# Altium PCB PCB1.PcbDoc
Units mm, origin at the board's own origin, x right, y up, seen from the top; angles counter-clockwise.
Board outline 59.11 x 65.08 mm, 4 copper layers (Top Layer, GND-Plane, 3V3 Polygon, Bottom Layer), stack 0.603 mm thick; 41 components, 21 nets, 157 pads, 83 vias.
Unrouted connection lines stored in the file: 58.
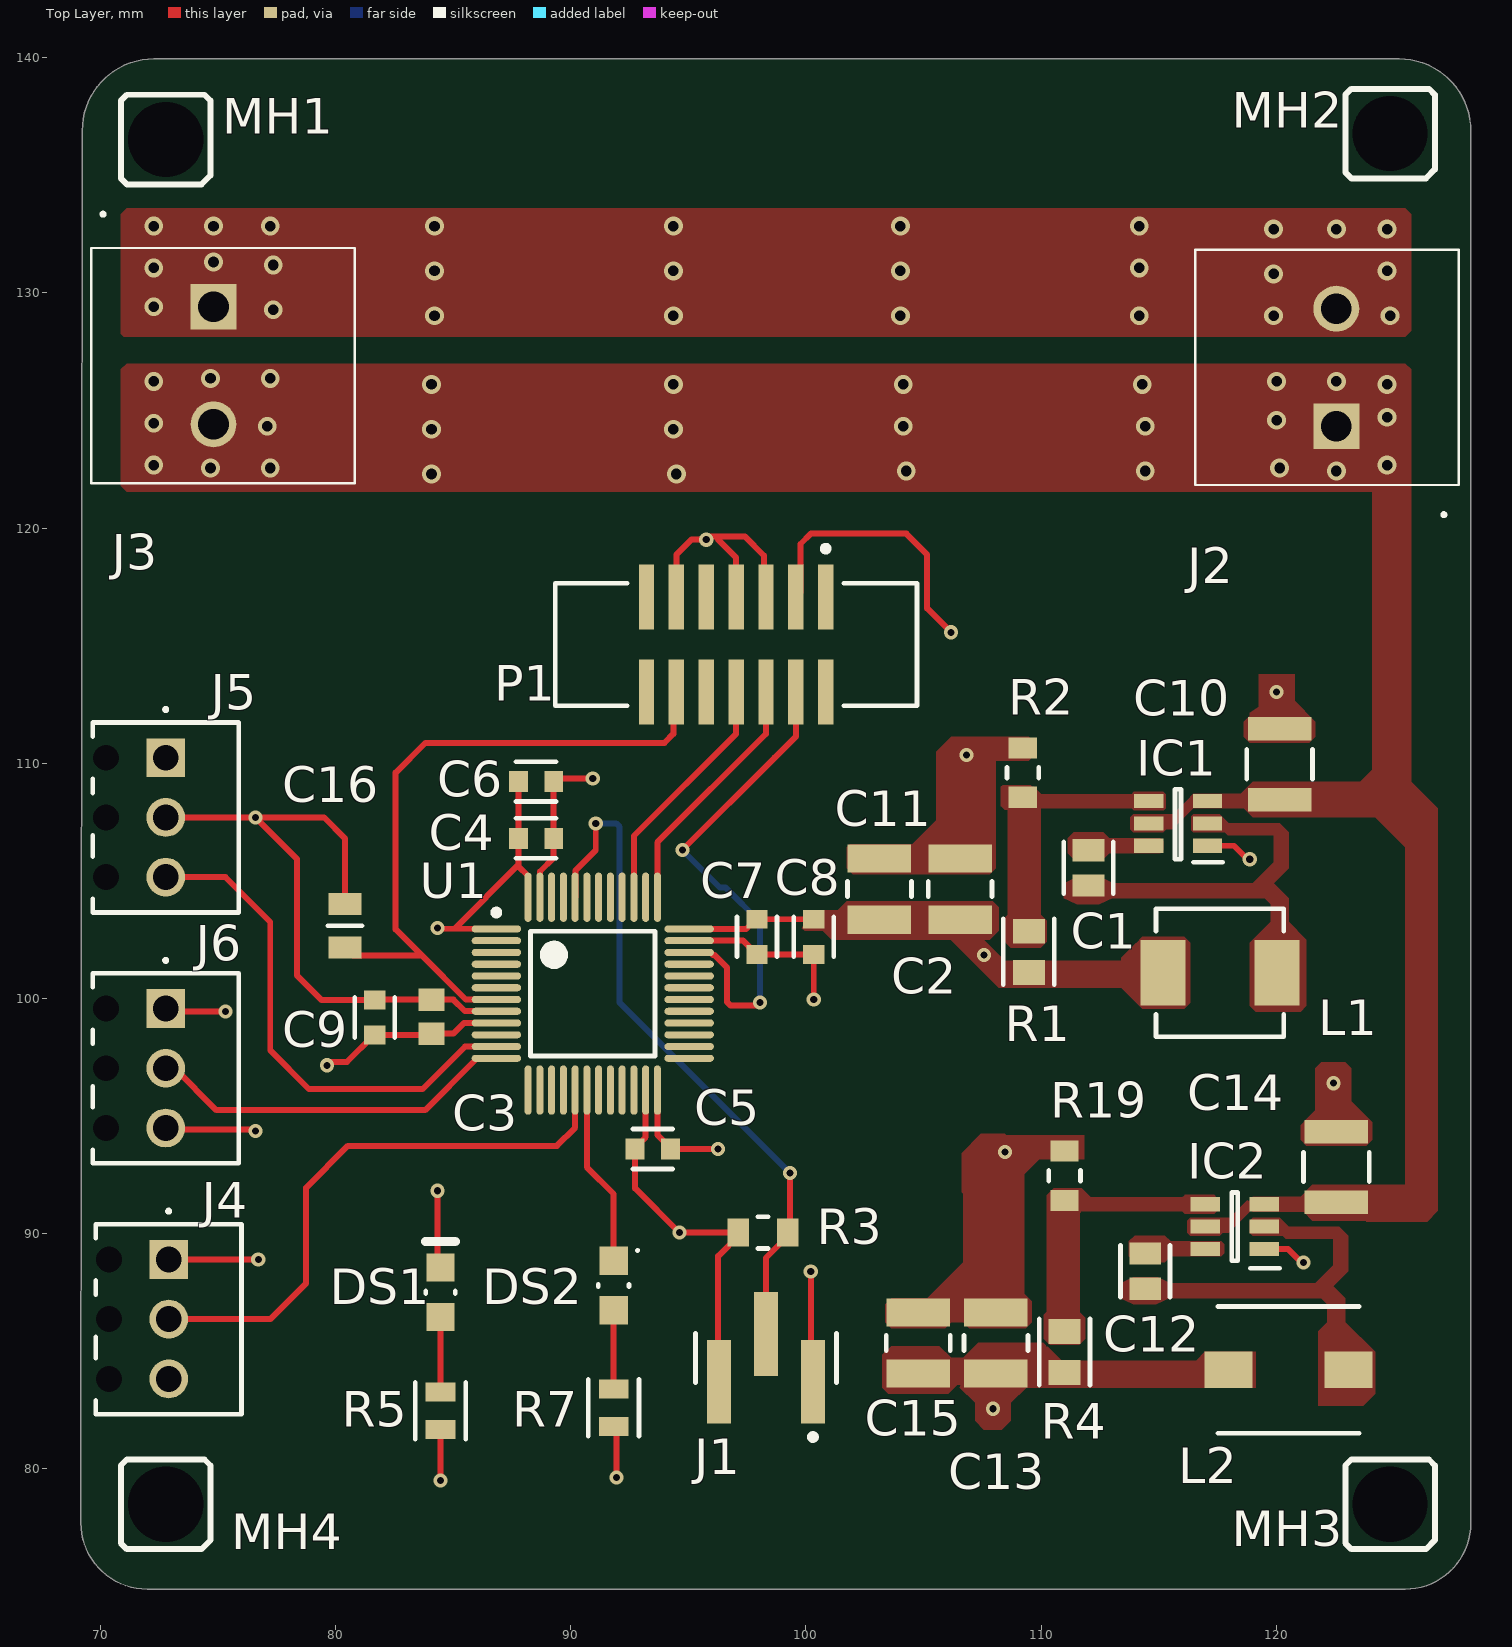
[diagram p0: Top Layer view]
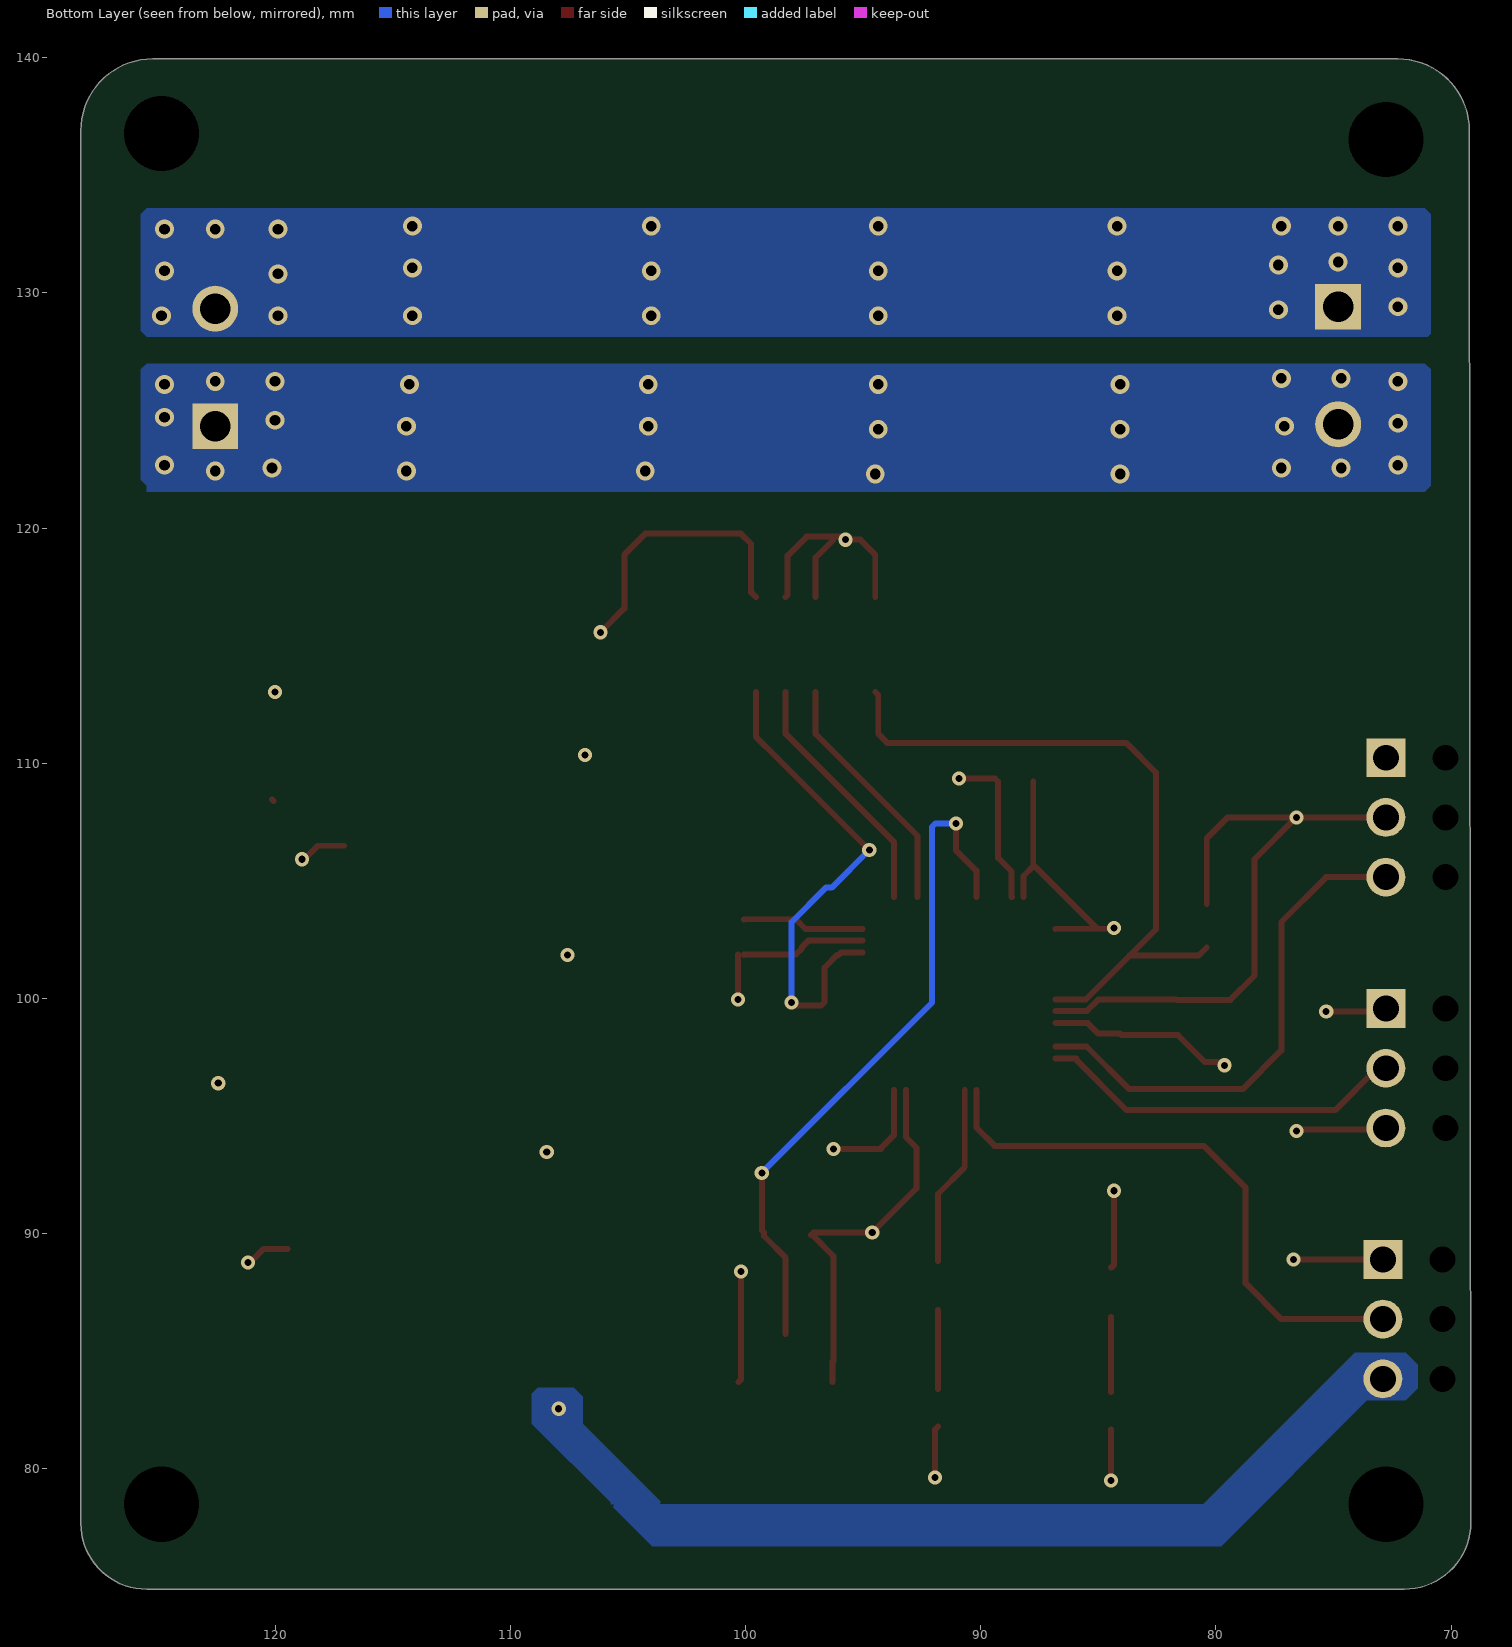
[diagram p1: Bottom Layer view, seen from below]
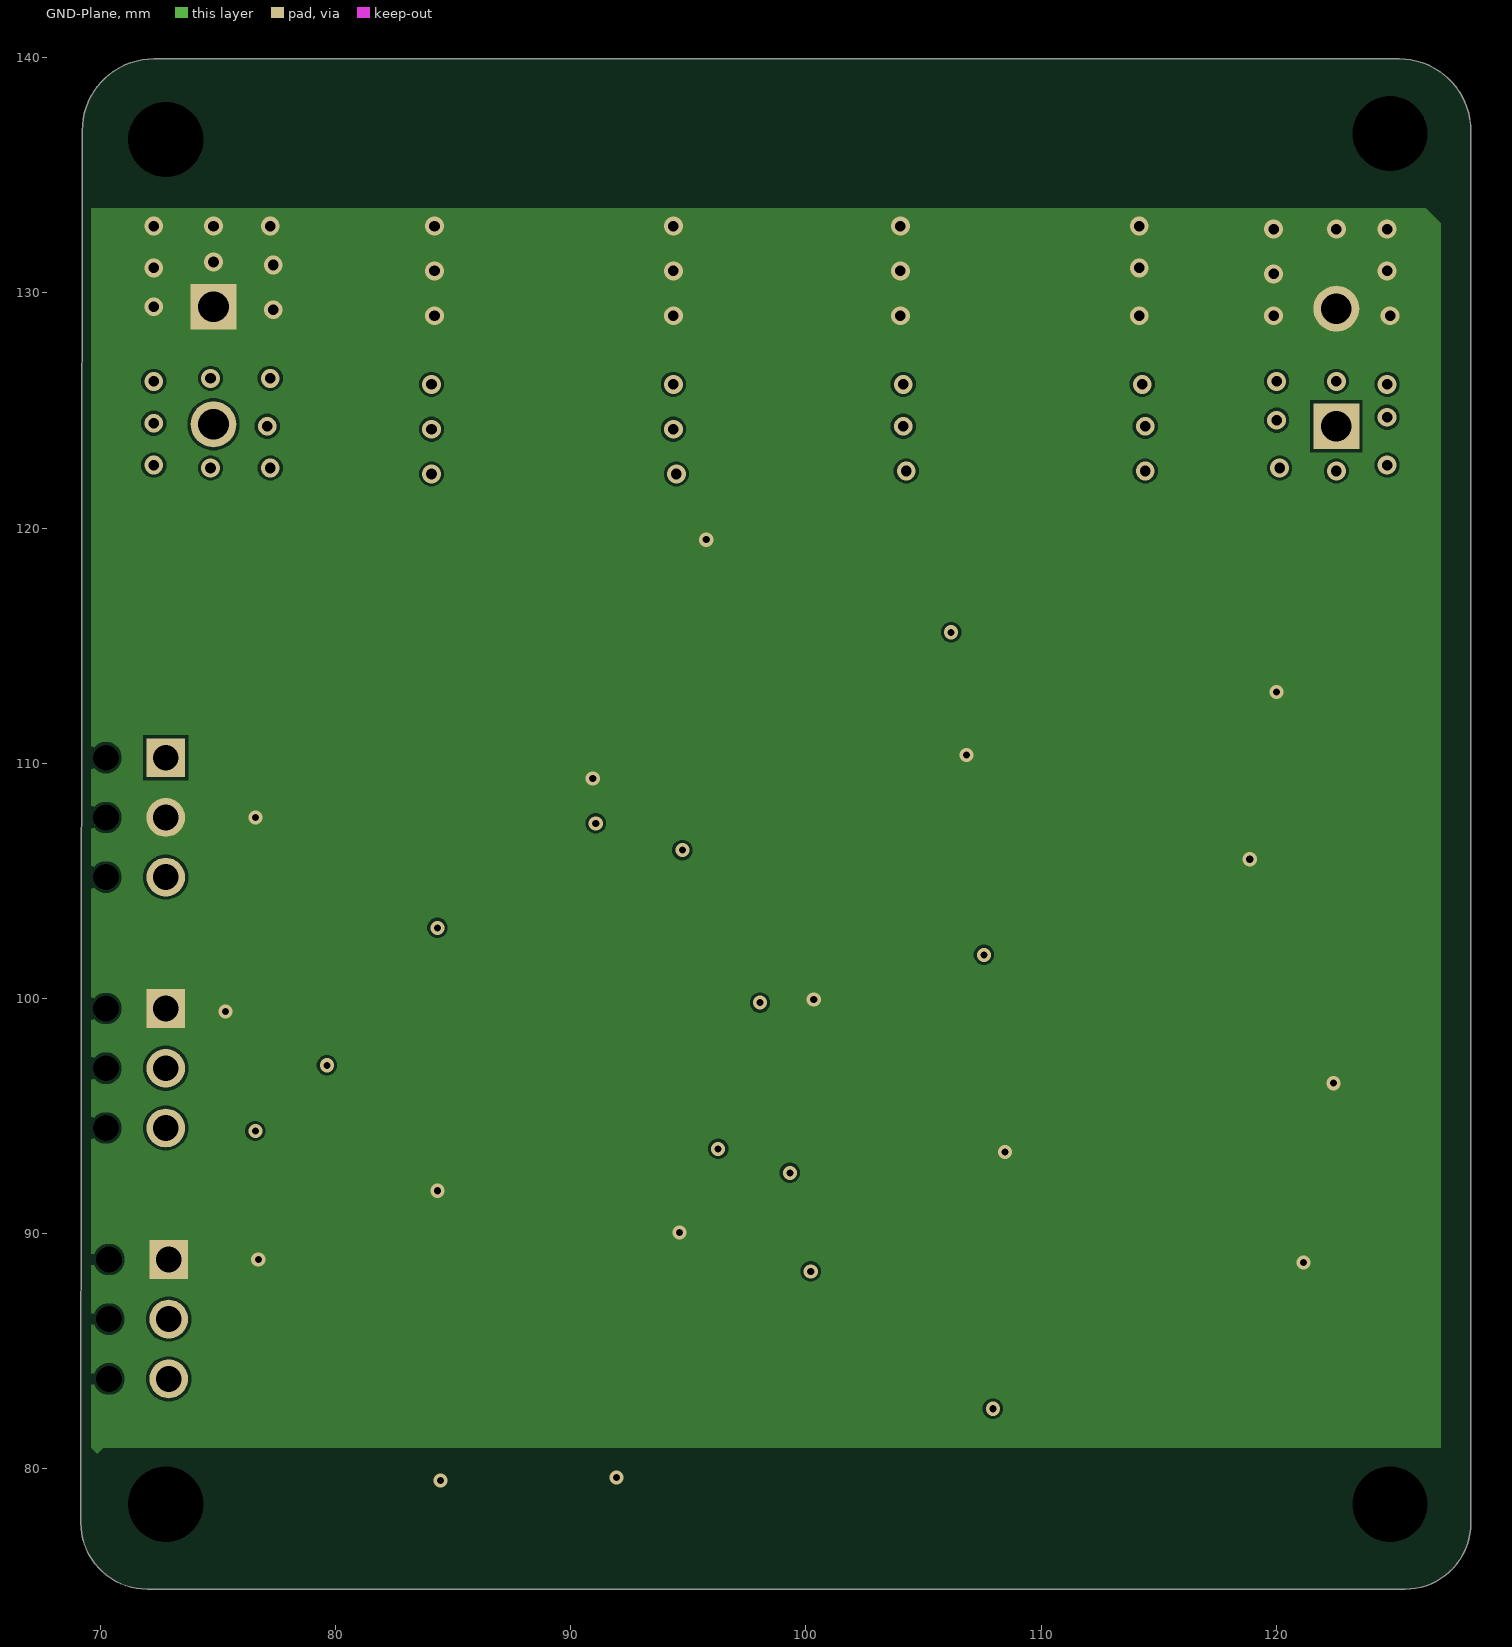
[diagram p2: GND-Plane]
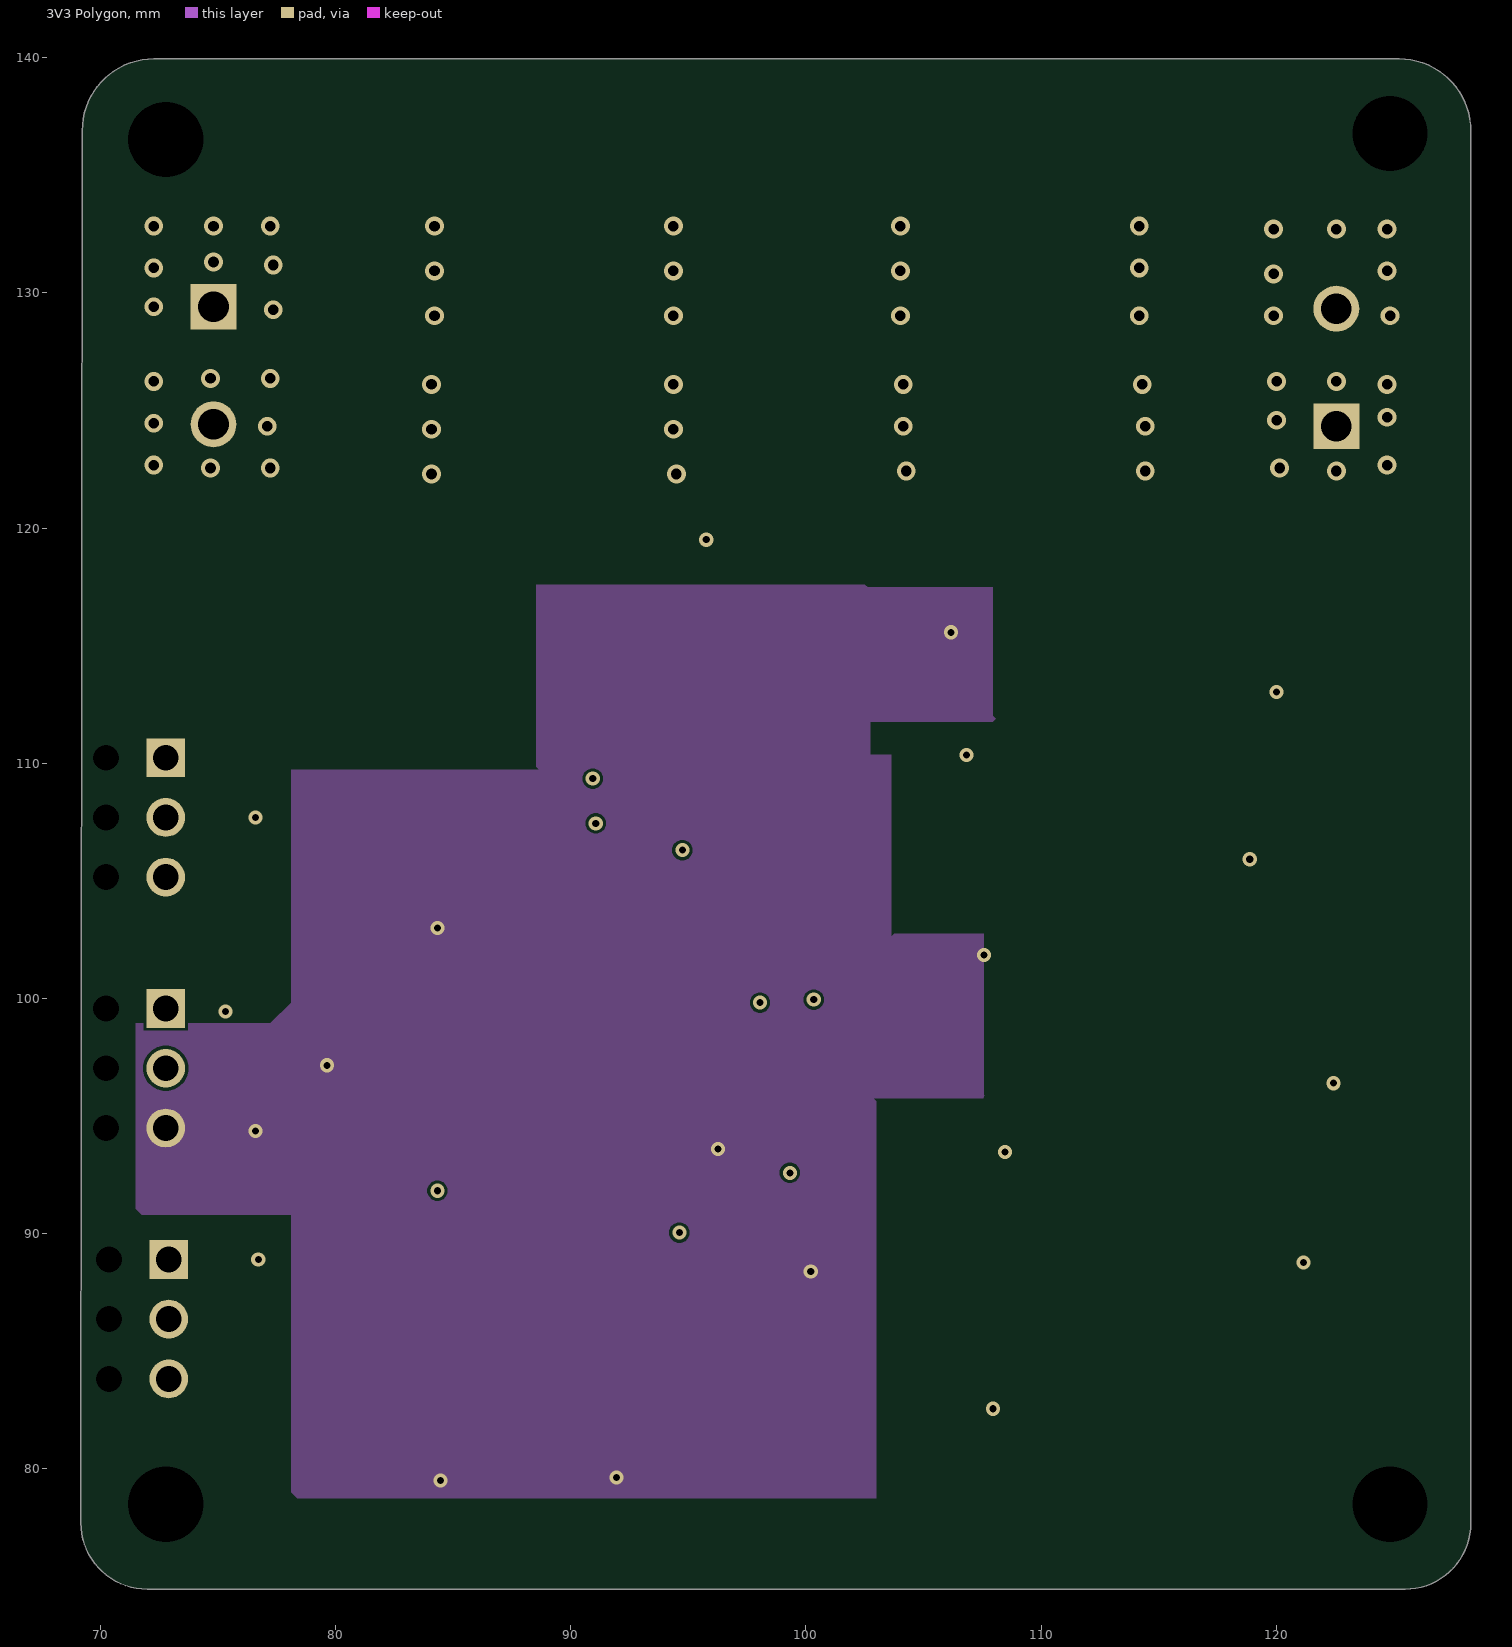
[diagram p3: 3V3 Polygon]
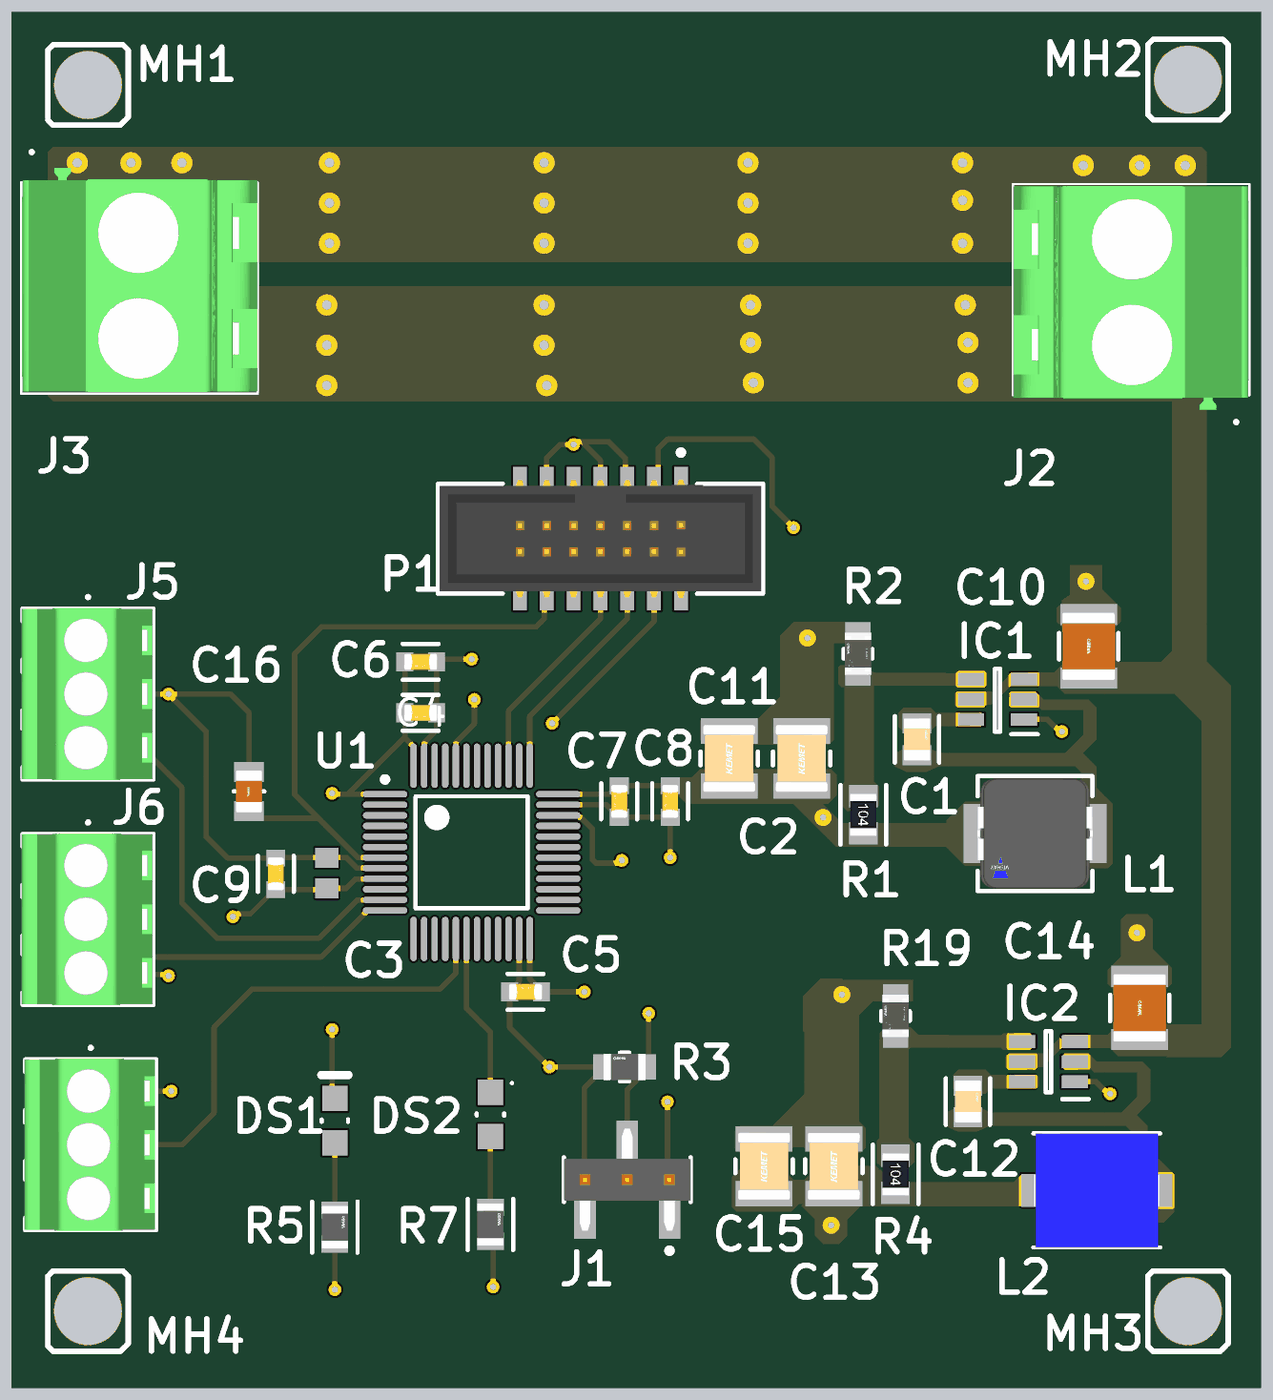
[diagram p4: 3D render of the assembled board from above, using the file's embedded part models]

## Layer stack, top to bottom
Top Solder: solder mask 0.0102, Solder Resist, Dk 3.5
Top Layer: signal copper 0.0356
Dielectric 2: prepreg 0.0711, PP-006, Dk 4.1
GND-Plane: signal copper 0.035
Dielectric 1: dielectric 0.32, FR-4, Dk 4.8
3V3 Polygon: signal copper 0.035
Dielectric 3: prepreg 0.0711, PP-006, Dk 4.1
Bottom Layer: signal copper 0.0356
Bottom Solder: solder mask 0.0102, Solder Resist, Dk 3.5

## Board outline
71.985,74.879 cw(c71.985,77.701) 69.164,77.701 69.222,136.906 cw(c72.27,136.906) 72.27,139.954 72.262,139.954 125.095,139.954 125.222,139.954 cw(c125.222,136.906) 128.27,136.906 128.27,77.673 cw(c125.476,77.673) 125.476,74.879

## Design rules (kind name [scope] priority, off if disabled: settings)
Clearance [All] p1: gap=0.125 ignorepadtopadclearanceinfootprint=FALSE
HoleSize HoleSizeVia [IsVia] p1: absolutevalues=TRUE maxlimit=0.45 minlimit=0.25 maxpercent=80.000 minpercent=20.000
HoleSize HoleSizePTH [IsPad] p2: absolutevalues=TRUE maxlimit=5.6 minlimit=0.5 maxpercent=80.000 minpercent=20.000
PolygonConnect [All] p1: connectstyle=Direct reliefconductorwidth=0.254 reliefentries=4 polygonreliefangle="90 Angle" airgapwidth=0.254
RoutingVias [All] p1: holewidth=0.35 width=0.55 viastyle="Through Hole" minholewidth=0.3 minwidth=0.5 maxholewidth=0.45 maxwidth=0.65
SolderMaskExpansion [All] p1: expansion=0.102 istentingtop=FALSE
SupplyNets "Schematic Supply Nets_4" [InNet('GND')] p1: voltage=0.000
SupplyNets "Schematic Supply Nets_3" [InNet('3V3')] p2: voltage=0.000
SupplyNets "Schematic Supply Nets_2" [InNet('12V12')] p3: voltage=0.000
SupplyNets "Schematic Supply Nets_1" [InNet('5V5')] p4: voltage=0.000
Width [All] p1: maxlimit=2.54 minlimit=0.125 preferedwidth=0.254
29 further rules are at their usual default settings.

## Components (designator, comment, footprint, x,y, rotation, side; value= is the part's Value field where it differs from the comment)
C1 "100nf" FP-C0805C104M5UACTU-MFG 112.014,105.549 r270 top
C2 "22uF" FP-C1210C226K4RACTU-MFG 106.553,104.648 r90 top
C3 "10nF" CAPC1608X92X38ML15T08 84.074,99.224 r270 top
C4 "100nF" FP-CC0603-DA-MFG 88.519,106.807 r0 top value="100 nF"
C5 "100nF" FP-CC0603-DA-MFG 93.484,93.599 r180 top value="100 nF"
C6 "4,7uF" FP-CC0603-DA-MFG 88.519,109.22 r0 top value="4.7 uF"
C7 "100nF" FP-CC0603-DA-MFG 97.917,102.616 r270 top value="100 nF"
C8 "4,7uF" FP-CC0603-DA-MFG 100.33,102.616 r270 top value="4.7 uF"
C9 "1uF" FP-CC0603-DA-MFG 81.661,99.187 r90 top value="1 uF"
C10 "2.2uF" FP-CC1210-G3-MFG 120.142,109.958 r90 top
C11 "22uF" FP-C1210C226K4RACTU-MFG 103.124,104.648 r90 top
C12 "100nf" FP-C0805C104M5UACTU-MFG 114.427,88.404 r270 top
C13 "22uF" FP-C1210C226K4RACTU-MFG 108.077,85.344 r90 top
C14 "2.2uF" FP-CC1210-G3-MFG 122.555,92.837 r90 top
C15 "22uF" FP-C1210C226K4RACTU-MFG 104.775,85.344 r90 top
C16 "100nF" FP-CC0805-EB-MFG 80.391,103.088 r90 top
DS1 "LTST-C170KRKT" LTST-C170KRKT_V 84.455,87.503 r90 top
DS2 "LTST-C170KGKT" LTST-LTST-C170KGKT-2_V 91.821,87.791 r270 top
IC1 "LMR51430XFDDCR" SOT95P280X110-6N 115.824,107.442 r180 top
IC2 "LMR51430XFDDCR" SOT95P280X110-6N 118.237,90.297 r180 top
J1 "TMM-103-01-L-S-SM" FP-TMM-103-01-L-S-SM-MFG 98.298,84.71 r180 top
J2 "1711026" 1711026 122.555,124.333 r90 top
J3 "1711026" 1711026 74.803,129.413 r270 top
J4 "1725669" 1725669 72.898,88.9 r270 top
J5 "1725669" 1725669 72.771,110.236 r270 top
J6 "1725669" 1725669 72.771,99.568 r270 top
L1 "2.2uH" FP-IHLP-2020BZ-FP_1_905x2-MFG 117.602,101.092 r180 top
L2 "3.3uH" INDPM6054X300N 120.523,84.201 r180 top
MH1 "" MTH 72.771,136.525 r0 top
MH2 "" MTH 124.841,136.779 r0 top
MH3 "" MTH 124.841,78.486 r0 top
MH4 "" MTH 72.771,78.486 r0 top
P1 "62701420621" 62701420621 97.028,115.05 r180 top
R1 "100k" FP-RQ73C2A-IPC_B 109.474,101.981 r270 top
R2 "22k1" FP-RT0805-MFG 109.22,109.601 r90 top value=22.1KΩ
R3 "10k" FP-AT0805-MFG 98.171,90.043 r180 top
R4 "100k" FP-RQ73C2A-IPC_B 110.998,84.963 r270 top
R5 "1k" FP-AT0805-IPC_C 84.455,82.463 r90 top
R7 "1k" FP-AT0805-IPC_C 91.821,82.59 r90 top
R19 "13k7" FP-RT0805-MFG 110.998,92.456 r90 top value=13.7KΩ
U1 "STM32F091CCT6" LQFP48_M 90.932,100.203 r0 top

## Footprints (in the part's own frame and the unit in brackets; to place one, negate y for a bottom-side part, rotate by r counter-clockwise, add the part's x,y. Pads: shape width x height; smd on the part's side, far side on the other; paste and mask are expansions set on the pad)
1711026 [mm]
  rect 1.95x1.95 hole 1.3: 1(0,0)
  round 1.95 hole 1.3: 2(5,0)
  silkscreen extent -3.81,-5.2 7.5,6, body extent -3.18,-5.17 7.42,5.98, height 18
1725669 [mm]
  rect 1.65x1.65 hole 1.1: 1(0,0)
  round 1.65 hole 1.1: 2(2.54,0) 3(5.08,0)
  round 0.55 hole 1.1 unplated: MH1(0,-2.54) MH2(2.54,-2.54) MH3(5.08,-2.54)
  silkscreen extent -2.1,-3.1 6.58,3.1, body extent -1.53,-3.15 6.61,3.05, height 8.5
62701420621 [mm] "Boc Header SMT type, 14p"
  rect 0.65x2.76 smd: 1(-3.81,-2.02) 2(-3.81,2.02) 3(-2.54,-2.02) 4(-2.54,2.02) 5(-1.27,-2.02) 6(-1.27,2.02) 7(0,-2.02) 8(0,2.02) 9(1.27,-2.02) 10(1.27,2.02) 11(2.54,-2.02) 12(2.54,2.02) 13(3.81,-2.02) 14(3.81,2.02)
  silkscreen extent -7.7,-4.2 7.7,2.6, body extent -7.62,-2.8 7.62,2.8, height 5.2
CAPC1608X92X38ML15T08 [mm] "Chip Capacitor, 2-Leads, Body 1.60x0.80mm, IPC Low Density"
  rect 0.95x1.1 smd: 1(-0.725,0) 2(0.725,0)
  body extent -0.87,-0.48 0.87,0.47, height 0.92
FP-AT0805-IPC_C [mm]
  rect 0.808x1.262 smd paste+0 mask+0: 1(-0.802,0) 2(0.802,0)
  silkscreen extent -1.21,-1.07 1.21,1.07, body extent -1.31,-0.77 1.31,0.77, height 0.25
FP-AT0805-MFG [mm]
  rect 0.9x1.2 smd paste+0 mask+0: 1(-1.05,0) 2(1.05,0)
  silkscreen extent -0.23,-0.67 0.23,0.67, body extent -1.6,-0.77 1.6,0.77, height 0.25
FP-C0805C104M5UACTU-MFG [mm]
  rect 0.95x1.35 smd paste+0 mask+0: 1(-0.75,0) 2(0.75,0)
  silkscreen extent -1.1,-1.05 1.1,1.05, body extent -1.4,-0.85 1.4,0.85, height 0.25
FP-C1210C226K4RACTU-MFG [mm]
  rect 1.2x2.7 smd paste+0 mask+0: 1(-1.3,0) 2(1.3,0)
  silkscreen extent -0.33,-1.36 0.33,1.36, body extent -2,-1.5 2,1.5, height 0.25
FP-CC0603-DA-MFG [mm]
  rect 0.8x0.9 smd paste+0 mask+0: 1(-0.75,0) 2(0.75,0)
  silkscreen extent -0.85,-0.85 0.85,0.85, body extent -1.35,-0.75 1.35,0.75, height 0.25
FP-CC0805-EB-MFG [mm]
  rect 0.95x1.4 smd paste+0 mask+0: 1(-0.925,0) 2(0.925,0)
  silkscreen extent 0,-0.72 0,0.72, body extent -1.6,-1.05 1.6,1.05, height 0.25
FP-CC1210-G3-MFG [mm]
  rect 1x2.7 smd paste+0 mask+0: 1(-1.5,0) 2(1.5,0)
  silkscreen extent -0.63,-1.4 0.63,1.4, body extent -2.32,-1.83 2.32,1.83, height 0.25
FP-IHLP-2020BZ-FP_1_905x2-MFG [mm]
  rect 1.905x2.79 smd paste+0 mask+0: 1(-2.425,0) 2(2.425,0)
  silkscreen extent -2.72,-2.72 2.72,2.72, body extent -3.48,-2.82 3.48,2.82, height 0.25
FP-RQ73C2A-IPC_B [mm]
  rect 1.058x1.362 smd paste+0 mask+0: 1(-0.877,0) 2(0.877,0)
  silkscreen extent -1.41,-1.08 1.41,1.08, body extent -1.66,-0.93 1.66,0.93, height 0.25
FP-RT0805-MFG [mm]
  rect 0.9x1.2 smd paste+0 mask+0: 1(-1.05,0) 2(1.05,0)
  silkscreen extent -0.23,-0.67 0.23,0.67, body extent -1.6,-0.77 1.6,0.77, height 0.25
FP-TMM-103-01-L-S-SM-MFG [mm]
  rect 1.02x3.56 smd paste+0 mask+0: 1(-2,1.015) 2(0,-1.015) 3(2,1.015)
  silkscreen extent -3,-1.05 3,3.49, body extent -3.1,-2.89 3.1,2.89, height 0.25
INDPM6054X300N [mm]
  rect 2.05x1.55 smd: 1(-2.55,0) 2(2.55,0)
  silkscreen extent -3,-2.7 3,2.7, body extent -3,-2.7 3,2.7, height 3
LQFP48_M [mm] "Thin QFP, 48-Leads, Body 7x7mm, Pitch 0.5mm, IPC Low Density"
  oval 2.1x0.3 smd: 1(-4.1,2.75) 2(-4.1,2.25) 3(-4.1,1.75) 4(-4.1,1.25) 5(-4.1,0.75) 6(-4.1,0.25) 7(-4.1,-0.25) 8(-4.1,-0.75) 9(-4.1,-1.25) 10(-4.1,-1.75) 11(-4.1,-2.25) 12(-4.1,-2.75) 25(4.1,-2.75) 26(4.1,-2.25) 27(4.1,-1.75) 28(4.1,-1.25) 29(4.1,-0.75) 30(4.1,-0.25) 31(4.1,0.25) 32(4.1,0.75) 33(4.1,1.25) 34(4.1,1.75) 35(4.1,2.25) 36(4.1,2.75)
  oval 0.3x2.1 smd: 13(-2.75,-4.1) 14(-2.25,-4.1) 15(-1.75,-4.1) 16(-1.25,-4.1) 17(-0.75,-4.1) 18(-0.25,-4.1) 19(0.25,-4.1) 20(0.75,-4.1) 21(1.25,-4.1) 22(1.75,-4.1) 23(2.25,-4.1) 24(2.75,-4.1) 37(2.75,4.1) 38(2.25,4.1) 39(1.75,4.1) 40(1.25,4.1) 41(0.75,4.1) 42(0.25,4.1) 43(-0.25,4.1) 44(-0.75,4.1) 45(-1.25,4.1) 46(-1.75,4.1) 47(-2.25,4.1) 48(-2.75,4.1)
  silkscreen extent -4.22,-2.65 2.65,3.57, body extent -3.5,-3.5 3.5,3.5, height 1.6
LTST-C170KRKT_V [mm] "SMD, 2-Leads, Body 2x1.25mm"
  rect 1.2x1.2 smd: 1(-1.05,0) 2(1.05,0)
  silkscreen extent -0.05,-0.63 2.16,0.64, body extent -1,-0.63 1,0.63, height 1.2
LTST-LTST-C170KGKT-2_V [mm] "SMD, 2-Leads, Body 2.00x1.25mm"
  rect 1.2x1.2 smd: 1(-1.05,0) 2(1.05,0)
  silkscreen extent -1.54,-0.65 0.05,1.07, body extent -1,-0.63 1,0.63, height 1.1
MTH [mm]
  round 1 hole 3.2: ""(0,0)
  silkscreen extent -1.91,-1.91 1.91,1.91
SOT95P280X110-6N [mm]
  rect 1.25x0.6 smd: 1(-1.25,0.95) 2(-1.25,0) 3(-1.25,-0.95) 4(1.25,-0.95) 5(1.25,0) 6(1.25,0.95)
  silkscreen extent -1.91,-1.45 0.13,1.65, body extent 0,0 0,0

## Part data
C1 C12: library part CMP-2007-03742-2, "CAP CER 0.1UF 50V Z5U 0805", Capacitance=100nF, Case Code (Imperial)=0805, Case Code (Metric)=2012, Dielectric=Z5U, Dielectric Material=Ceramic, Max Operating Temperature=85°C, Min Operating Temperature=10°C, Package Quantity=1, Tolerance=20%, Voltage=50V, Case/Package=0805, Construction=Flat, Contact Plating=Tin, Depth=1.25mm, Dissipation Factor=4%, Height=0.78mm, Lead Free="Lead Free", Lead Pitch=0.75mm, Length=2mm, Mount="Surface Mount", Number of Pins=2, Packaging="Tape and Reel", Radiation Hardening=No, REACH SVHC="No SVHC", RoHS Compliant=Yes, Series=C, Termination=SMD/SMT, Thickness=0.035inch, Voltage Rating=50V, Voltage Rating (DC)=50V, Width=1.2mm
C2 C11 C13 C15: library part CMP-03020-034651-1, "CAP CER 22UF 16V X7R 1210", Case Code (Imperial)=1210, Case Code (Metric)=3225, Dielectric=X7R, Dielectric Material=Ceramic, Max Operating Temperature=125°C, Min Operating Temperature=-55°C, Package Quantity=1000, Tolerance=10%, Voltage=16V, Capacitance=22uF, Case/Package=1210, Depth=2.5mm, Dissipation Factor=5%, Height=2.5mm, Length=3.2mm, Mount="Surface Mount", Packaging="Cut Tape", REACH SVHC="No SVHC", Termination=SMD/SMT, Thickness=0.11inch, Voltage Rating=16V, Voltage Rating (DC)=16V, Weight=0.000564oz, Width=0.098inch
C3: library part CMP-2006-01137-1, Manufacturer=Vitramon, Part Number=VJ0603Y103KXJAC
C4 C5 C7: library part CMP-03422-000234-1, "CAP CER 0.1UF 25V X7R 0603", Capacitance="100 nF", Manufacturer=YAGEO, Manufacturer Part Number=CC0603KRX7R8BB104, Package=CC0603-DA, Temperature="-55°C to +125°C", Temperature Characteristic=X7R, Temperature Coefficient=15%, Temperature Range High=+125°C, Temperature Range Low=-55°C, Tolerance=0.1, Voltage="25 V", Automotive=No, Category=Cap, ComponentLink2Description=Datasheet, ComponentLink2URL=http://www.yageo.com/documents/recent/UPY-GPHC_X7R_6.3V-to-50V_18.pdf, Device Class L1="Passive Components", Device Class L2=Capacitors, Device Class L3="Ceramic Capacitors", Digikey Description="CAP CER 0.1UF 25V X7R 0603", Footprint Url=http://www.yageo.com/exep/pages/download/literatures/UPY-C_GEN_24.pdf, Height=0.9mm, Lead Free=Yes, Material=Ceramic, Mouser Description="CC Series 0603 0.1 uF 25 V ±10% Tolerance X7R SMT Multilayer Ceramic Capacitor", Octopart=https://octopart.com/cc0603krx7r8bb104-yageo-8376534, RoHS=TRUE, Voltage Rating="25 V"
C6 C8: library part CMP-03422-001236-1, "CAP CER 4.7UF 16V X5R 0603", Capacitance="4.7 uF", Manufacturer=YAGEO, Manufacturer Part Number=CC0603KRX5R7BB475, Package=CC0603-DA, Temperature="-55°C to +125°C", Temperature Characteristic=X5R, Temperature Coefficient=15%, Temperature Range High=+125°C, Temperature Range Low=-55°C, Tolerance=0.1, Voltage="16 V", Automotive=No, Category=Cap, ComponentLink2Description=Datasheet, ComponentLink2URL=http://www.yageo.com/documents/recent/UPY-GPHC_X7R_6.3V-to-50V_18.pdf, Device Class L1="Passive Components", Device Class L2=Capacitors, Device Class L3="Ceramic Capacitors", Digikey Description="CAP CER 4.7UF 16V X5R 0603", Footprint Url=http://www.yageo.com/exep/pages/download/literatures/UPY-C_GEN_24.pdf, Height=0.9mm, Lead Free=Yes, Material=Ceramic, Mouser Description="Multilayer Ceramic Capacitors MLCC - SMD/SMT 4.7uF 16V X5R 10%", Octopart=https://octopart.com/cc0603krx5r7bb475-yageo-34978295, RoHS=TRUE, Voltage Rating="16 V"
C9: library part CMP-1035-02737-2, "CAP CER 1UF 16V X5R 0603", Capacitance="1 uF", Manufacturer=YAGEO, Manufacturer Part Number=CC0603KRX5R7BB105, Package=CC0603-DA, Temperature="-55°C to +125°C", Temperature Characteristic=X5R, Temperature Coefficient=15%, Temperature Range High=+125°C, Temperature Range Low=-55°C, Tolerance=0.1, Voltage="16 V", Automotive=No, Category=Cap, ComponentLink2Description=Datasheet, ComponentLink2URL=http://www.yageo.com/documents/recent/UPY-GPHC_X7R_6.3V-to-50V_18.pdf, Device Class L1="Passive Components", Device Class L2=Capacitors, Device Class L3="Ceramic Capacitors", Digikey Description="CAP CER 1UF 16V X5R 0603", Footprint Url=http://www.yageo.com/exep/pages/download/literatures/UPY-C_GEN_24.pdf, Height=0.9mm, Lead Free=Yes, Material=Ceramic, Mouser Description="Multilayer Ceramic Capacitors MLCC - SMD/SMT 1.0uF 16V X5R 10%", Octopart=https://octopart.com/cc0603krx5r7bb105-yageo-8376530, RoHS=TRUE, Voltage Rating="16 V"
C10 C14: library part CMP-03422-001503-1, "CAP CER 1210", Case/Package=1210, Dielectric=X7R, Max Operating Temperature=125°C, Min Operating Temperature=-55°C, Tolerance=10%, Capacitance=2.2uF, Depth=2.5mm, Length=3.2mm, Packaging="Tape and Reel", RoHS Compliant=Yes
C16: library part CMP-00621-107850848-1, "CC0805KKX7RYBB104 Capacitor Ceramic 0.01uF 250V X7R 10% 0805 T/R", Case/Package=0805, Max Operating Temperature=125°C, Min Operating Temperature=-55°C, Tolerance=10%, Voltage Rating=250V, Capacitance=100nF, Height=1.45mm, Material=Ceramic, NexarPartId=107850848
DS1: library part CMP-2000-07593-1, "LED Red, 75 mW, 54 mcd, -55 to 85 degC, 2-Pin SMD, RoHS, Tape and Reel", Case Code (Imperial)=0805, Case Code (Metric)=2012, Colour=Red, Forward Current=30mA, Forward Voltage=2V, Lens Colour=Colorless, Manufacturer=Lite-On, Max Operating Temperature=85degC, Min Operating Temperature=-55degC, Package Description="2-Pin Surface Mount Device, Body 2 x 1.25 mm", Package Quantity=1, Package Reference=C170KRKT, Power Dissipation=75mW, Test Current=20mA, Case\/Package=0805, Datasheet URL=http://optoelectronics.liteon.com/upload/download/DS-22-99-0150/LTST-C170KRKT.pdf, Datasheet Version="Rev. D, 11/2014", Depth=1.6mm, Dominant Wavelength=631nm, Height=1.1mm, Illumination Colour=Red, Lead Free=LeadFree, Length=3.2mm, Lens Style=Rectangular, Lens Transparency=Clear, Luminous Intensity=54mcd, Manufacturer URL=http://www.us.liteon.com/, Mount=SurfaceMount, Mounting Technology=SurfaceMount, Number of Elements=1, Number of LEDs=1, Number of Pins=2, Packaging=TapeandReel, Power Rating=75mW, Radiation Hardening=No, RoHSCompliant=True, Viewing Angle=130degrees, Wavelength=639nm, Width=1.25mm
DS2: library part CMP-2000-06620-1, "Ultra Bright AlInGaP Chip LED, 75 mW, -55 to 85 degC, 2-Pin SMD (0805), RoHS, Tape and Reel", Emitting Color=YellowGreen, Forward Current=30mA, Forward Voltage=2.4V, Manufacturer=Lite-On, Operating Temp Range=-55Cto85C, Operating Temperature Classification=Industrial, Package Description="2-Pin Surface Mounted Device, Body 2 x 1.25 mm", Package Reference=LTST-C170KGKT-2, Package Type=ChipLed, Power Dissipation=75W, Power Dissipation Max=75mW, Reverse Voltage=5V, Test Current (It)=20mA, Chip Material=AlGaInP, Datasheet URL=http://optoelectronics.liteon.com/upload/download/DS22-2000-073/S_110_LTST-C170KGKT.pdf, Datasheet Version="Rev. G, 06/2005", DELETED=Compliant, Dominant Wave Length=571nm, Forward Current Max=30mA, High Brightness=Yes, Lens Dimensions=1.4x1.25x0.6mm, Lum Intensity=35mcd, Luminous Intensity=35mcd, Main Category=ChipLED, Manufacturer URL=http://www.us.liteon.com/, Mounting=SurfaceMount, Mounting Technology=SurfaceMount, Number of  Elements=1, Packaging=TapeandReel, Peak Wavelength=574nm, Pin Count=2, Product Depth (mm)=1.25mm, Product Height (mm)=1.1mm, Product Length (mm)=2mm, Rad Hardened=No, Shape Type=Rectangular, Type=Uni-Color, Viewing Angle=130deg
IC1 IC2: "Integrated Circuit", Manufacturer_Name="Texas Instruments", Mouser Part Number=595-LMR51430XFDDCR, Arrow Part Number=LMR51430XFDDCR, Arrow Price/Stock=https://www.arrow.com/en/products/lmr51430xfddcr/texas-instruments.html?utm_currency=USD&region=nac, Datasheet Link=https://www.ti.com/lit/ds/symlink/lmr51420.pdf?ts=1651317966125, Height=1.1mm, Manufacturer_Part_Number=LMR51430XFDDCR, Mouser Price/Stock=https://www.mouser.co.uk/ProductDetail/Texas-Instruments/LMR51430XFDDCR?qs=vvQtp7zwQdOoH7ISqkGKmw%3D%3D
J1: library part CMP-02766-001735-1, "CONN HEADER SMD 3POS 2MM", Flammability Rating="UL94 V-0", Housing Color=Black, Max Current Rating=3.9A, Max Operating Temperature=125°C, Max Voltage Rating (AC)=500V, Min Operating Temperature=-55°C, Connector Type=Header, Contact Finish - Mating=GOLD, Contact Material=Bronze, Contact Plating=Gold, Contact Shape=Square, Contact Type="Male Pin", Depth=1.97mm, Fastening Type=Pull, Gender=Male, Housing Material=Polymer, Insulation Color=Black, Insulation Material=Polymer, Lead Free="Lead Free", Length=6mm, Number of Contacts=3, Number of Positions=3, Number of Rows=1, Orientation=Straight, Packaging=Bulk, Pitch=2mm, Radiation Hardening=No, REACH SVHC="No SVHC", RoHS Compliant=Yes, Series=TMM, Termination=Solder
J2 J3: "Connector", Manufacturer_Name="Phoenix Contact", Mouser Part Number=651-1711026, Arrow Part Number=1711026, Arrow Price/Stock=https://www.arrow.com/en/products/1711026/phoenix-contact?utm_currency=USD&region=nac, Datasheet Link=https://www.phoenixcontact.com/en-us/products/printed-circuit-board-terminal-mkds-3-2-1711026?type=pdf, Height=18.2mm, Manufacturer_Part_Number=1711026, Mouser Price/Stock=https://www.mouser.co.uk/ProductDetail/Phoenix-Contact/1711026?qs=JcjeNNoqGSMahJ%2FDM5awSg%3D%3D
J4 J5 J6: "Connector", Manufacturer_Name="Phoenix Contact", Mouser Part Number=651-1725669, Arrow Part Number=1725669, Arrow Price/Stock=https://www.arrow.com/en/products/1725669/phoenix-contact?utm_currency=USD&region=nac, Datasheet Link=https://www.phoenixcontact.com/en-us/products/printed-circuit-board-terminal-mpt-05-3-254-1725669?type=pdf, Height=8.65mm, Manufacturer_Part_Number=1725669, Mouser Price/Stock=https://www.mouser.co.uk/ProductDetail/Phoenix-Contact/1725669?qs=A%2FKWGUWTCZjmkTL0Oe91ew%3D%3D
L1: library part CMP-02424-000260-1, "Fixed Inductors Commercial Low DCR Series 2.2uH 5A 37.7mΩ 20%", Case/Package=2020, Current Rating=5A, DC Resistance (DCR)=37.7mR, Inductance Tolerance=20%, Max DC Current=5.5A, Max Operating Temperature=125°C, Min Operating Temperature=-55°C, Package Quantity=2000, Self Resonant Frequency=41MHz, Test Frequency=100kHz, Contact Plating=Tin, Core Material=Metal, Depth=5.43mm, Height=2mm, Height - Seated (Max)=0.079inch, Inductance=2.2uH, Lead Free="Lead Free", Length=5.74mm, Military Standard=Not, Mount="Surface Mount", Number of Pins=2, Packaging="Tape and Reel", Radiation Hardening=No, RMS Current (Irms)=5A, Saturation Current=5.5A, Shielding=Shielded, Termination=SMD/SMT, Tolerance=20%, Width=0.204inch
L2: library part PA4340.332NLT, "Inductor", Manufacturer_Name="Yageo Group", Mouser Part Number=673-PA4340.332NLT, Arrow Part Number=PA4340.332NLT, Arrow Price/Stock=https://www.arrow.com/en/products/pa4340.332nlt/pulse-electronics-corporation?utm_currency=USD&region=europe, Datasheet Link=https://www.arrow.com/en/products/pa4340.332nlt/pulse-electronics-corporation, Height=3mm, Manufacturer_Part_Number=PA4340.332NLT, Mouser Price/Stock=https://www.mouser.co.uk/ProductDetail/Pulse-Electronics/PA4340332NLT?qs=%2FzQKu7YvIMZ40DmrCvsoMQ%3D%3D
MH1 MH2 MH3 MH4: library part MountingHole
P1: library part CMP-03913-133967346-2, "Conn, Hdr, 14Pos, 2Row, 1.27Mm, Smt Rohs Compliant: Yes", Current Rating=1A, Insulation Resistance=1GΩ, Max Operating Temperature=105°C, Min Operating Temperature=-40°C, Length=13.64mm, Number of Pins=14, Pitch=1.27mm, RoHS=Compliant
R1 R4: library part CMP-03211-011351-1, "RQ73 0805 100KΩ 0.2W 10ppm/°C 0.1% 100V"
R2: library part CMP-2001-01692-2, "RES SMD 22.1K OHM 0.1% 1/8W 0805", Manufacturer=Yageo, Manufacturer Part Number=RT0805BRD0722K1L, Package=RT0805, Power Rating=0.125W, Resistance=22.1KΩ, Temperature="-55°C to +155°C", Temperature Coefficient="25 ppm/°C", Temperature Range High=+155°C, Temperature Range Low=-55°C, Tolerance=0.0025, Voltage Rating=150V, Automotive=No, Category=Res, ComponentLink2Description=Datasheet, ComponentLink2URL=http://www.yageo.com/documents/recent/PYu-RT_1-to-0.01_RoHS_L_9.pdf, Composition="Thin Film", Device Class L1="Passive Components", Device Class L2=Resistors, Device Class L3="Chip SMD Resistors", Digikey Description="RES SMD 22.1K OHM 0.1% 1/8W 0805", Footprint Url=http://www.yageo.com/exep/pages/download/literatures/PYu-R_Mount_10.pdf, Height=0.6mm, Ipc Land Pattern Name=RESC200125X50, Lead Free=Yes, Mouser Description="Thin Film Resistors - SMD 1/8W 22.1K ohm .1% 25ppm", Octopart=https://octopart.com/rt0805brd0722k1l-yageo-1447960, RoHS=TRUE, Series=RT
R3: library part CMP-03412-049031-1, "Thin Film Chip Resistors Automotive Grade 10kΩ 0.5% 50ppm/°C 0805", Case/Package=0805, Max Operating Temperature=155°C, Max Power Dissipation=125mW, Min Operating Temperature=-55°C, Ratings=AEC-Q200, Resistance=10kR, Resistor Type="Thin Film", Temperature Coefficient=50ppm/°C, Tolerance=0.5%, Features="Moisture Resistant", Height=0.024inch, Length=0.079inch, Number of Terminations=2, Packaging="Tape and Reel", RoHS Compliant=Yes, Series=AT, Width=0.049inch
R5 R7: library part CMP-03412-050024-1, "Thin Film Chip Resistors Automotive Grade 1kΩ 0.1% 50ppm/°C 0805"
R19: library part CMP-03412-025952-1, "RES 13.7K OHM 1/8W .1% SMD 0805", Manufacturer=Yageo, Manufacturer Part Number=RT0805BRD0713K7L, Package=RT0805, Power Rating=0.125W, Resistance=13.7KΩ, Temperature="-55°C to +155°C", Temperature Coefficient="25 ppm/°C", Temperature Range High=+155°C, Temperature Range Low=-55°C, Tolerance=0.0025, Voltage Rating=150V, Automotive=No, Category=Res, ComponentLink2Description=Datasheet, ComponentLink2URL=http://www.yageo.com/documents/recent/PYu-RT_1-to-0.01_RoHS_L_9.pdf, Composition="Thin Film", Device Class L1="Passive Components", Device Class L2=Resistors, Device Class L3="Chip SMD Resistors", Digikey Description="RES 13.7K OHM 1/8W .1% SMD 0805", Footprint Url=http://www.yageo.com/exep/pages/download/literatures/PYu-R_Mount_10.pdf, Height=0.6mm, Ipc Land Pattern Name=RESC200125X50, Lead Free=Yes, Mouser Description="Thin Film Resistors - SMD 1/8W 13.7K ohm .1% 25ppm", Octopart=https://octopart.com/rt0805brd0713k7l-yageo-1409410, RoHS=TRUE, Series=RT
U1: library part CMP-0304-00055-1, "ARM-based 32-bit MCU, CAN, 12 timers, ADC, DAC & Comm. Interface, 2 to 3.6 V, -40 to 85 degC, 48-Pin LQFP, RoHS, Tray", Capacitive Sensing Channels=16, CPU Frequency="48 MHz Max.", Manufacturer=STMicroelectronics, Operating Voltage="2 to 3.6 V", Temperature Range="-40 to 85 degC", ComponentLink1Description="Manufacturer URL", ComponentLink1URL=www.st.com, ComponentLink2Description=Datasheet, ComponentLink2URL=http://www.st.com/st-web-ui/static/active/en/resource/technical/document/datasheet/DM00115237.pdf, ComponentLink3Description="Package Specification", ComponentLink3URL=http://www.st.com/st-web-ui/static/active/en/resource/technical/document/datasheet/DM00115237.pdf, DatasheetVersion="Rev. 2", Flash="256 Kbytes", GPIOs=37, Mounting Technology="Surface Mount", PackageDescription="48-Pin Low-Profile Quad Flat Package, Body 7 x 7 mm, Pitch 0.5 mm", Packing=Tray, PartNumber=STM32F091CCT6, RoHS=TRUE, SRAM="32 Kbytes"

## Via types
v1: diameter 0.8, hole 0.45, Top Layer to Bottom Layer, 55 vias
v2: diameter 0.6, hole 0.3, Top Layer to Bottom Layer, 28 vias

## Nets (pads, with @x,y where several pads share a name; then routed paths per layer and width w, separated by ;. In a path a pad name is that pad's centre, name@x,y a point inside that pad or via, vN(x,y) a via of type N, cw(c..) or ccw(c..) an arc to the next point about the centre after c; other vN are vias at no path point)
3V3: C2.1 C3.2 C4.1 C5.1 C6.1 C7.1 C8.1 C9.1 C11.1 J1.1 J6.3 L1.2 P1.3 R1.2 R5.1 R7.1 U1.1 U1.9 U1.24 U1.36 U1.48 | length 54.3
  Top Layer w0.254: J6.3 72.834,94.424 76.517,94.424 v2(76.581,94.361) ; v2(79.629,97.155) 79.772,97.298 80.472,97.298 81.611,98.437 C9.1 84.012,98.437 C3.2 85.005,98.499 85.45,98.944 86.823,98.944 U1.9 ; v2(84.328,102.997) 84.363,102.962 85.055,102.962 ; v2(84.455,79.502) R5.1 ; U1.1 86.823,102.962 85.055,102.962 ; 87.769,105.616 88.182,105.203 U1.48 ; C6.1 C4.1 87.769,105.676 85.055,102.962 ; R7.1 91.948,81.661 v2(91.948,79.629) ; U1.24 93.682,94.201 94.234,93.649 C5.1 v2(96.266,93.599) ; U1.36 97.454,102.953 97.867,103.366 C7.1 100.064,103.366 C8.1@100.076,103.354 ; P1.3 99.766,117.268 99.766,119.324 100.203,119.761 104.267,119.761 105.156,118.872 105.156,118.3 105.156,117.157 105.156,116.586 v2(106.172,115.57) ; v2(100.203,88.392) 100.203,83.79 J1.1
  other v2: 107.569,101.854
5V5: C13.1 C15.1 J4.3 L2.2 R4.2
  other v2: 107.95,82.55
12V12: C10.1 C14.1 IC1.3 IC1.5 IC2.3 IC2.5 J2.1 J3.2 | length 0.1
  Top Layer w0.254: C10.1@120.076,108.392 C10.1
  other v1: 84.074,122.301 94.488,122.301 104.267,122.428 114.427,122.428 122.555,122.428 74.676,122.555 77.216,122.555 120.142,122.555 72.263,122.682 124.714,122.682 84.074,124.206 94.361,124.206 77.089,124.333 104.14,124.333 114.427,124.333 72.263,124.46 120.015,124.587 124.714,124.714 84.074,126.111 94.361,126.111 104.14,126.111 114.3,126.111 124.714,126.111 72.263,126.238 120.015,126.238 122.555,126.238 74.676,126.365 77.216,126.365
BOOT: J1.2 R3.1 U1.44 | length 29.6
  Top Layer w0.254: U1.44 90.191,104.312 90.191,105.431 91.059,106.299 v2(91.059,107.442) ; J1.2 98.298,88.97 99.221,89.893 R3.1 99.314,90.136 v2(99.314,92.583)
  Bottom Layer w0.254: v2(91.059,107.442) 91.926,107.442 92.075,107.293 92.075,99.822 v2(99.314,92.583)
"Data Res": J4.2 U1.17 | length 24.6
  Top Layer w0.254: J4.2 77.216,86.36 78.74,87.884 78.74,91.948 80.518,93.726 89.408,93.726 90.182,94.5 U1.17
Debug: DS2.1 U1.18 | length 7.7
  Top Layer w0.254: U1.18 90.682,92.822 91.821,91.683 DS2.1
ESC-Signal: J5.3 U1.11 | length 21.7
  Top Layer w0.254: J5.3 75.311,105.156 77.216,103.251 77.216,97.79 78.867,96.139 83.693,96.139 85.507,97.953 U1.11
GND: C2.2 C3.1 C4.2 C5.2 C6.2 C7.2 C8.2 C9.2 C10.2 C11.2 C13.2 C14.2 C15.2 C16.2 DS1.2 IC1.1 IC2.1 J1.3 J2.2 J3.1 J4.1 J5.2 J6.1 P1.5 P1.7 P1.11 R2.2 R3.2 R19.2 U1.8 U1.23 U1.35 U1.47 | length 81.8
  Top Layer w0.254: J6.1 72.898,99.441 v2(75.311,99.441) ; J5.2 v2(76.581,107.696) ; J4.1 v2(76.708,88.9) ; C16.2 80.391,106.807 79.502,107.696 v2(76.581,107.696) ; v2(84.328,91.821) 84.328,88.68 DS1.2 ; U1.8 86.823,99.462 85.492,99.462 85.005,99.949 C3.1 81.673,99.949 C9.2 79.387,99.937 78.359,100.965 78.359,105.918 v2(76.581,107.696) ; U1.47 88.691,104.312 88.691,105.398 89.269,105.976 C4.2 C6.2 89.396,109.347 v2(90.932,109.347) ; C5.2 92.734,91.924 v2(94.615,90.043) R3.2 ; C5.2@92.734,93.649 93.182,94.097 U1.23 ; P1.11 94.488,118.872 95.123,119.507 v2(95.758,119.507) 95.885,119.634 97.409,119.634 98.212,118.831 98.212,117.156 P1.5 ; U1.35 97.33,102.453 97.594,102.189 97.594,102.139 97.867,101.866 100.064,101.866 C8.2@100.076,101.854 ; 96.266,119.507 97.028,118.745 P1.7 ; J1.3 96.298,84.55 96.266,84.582 96.266,89.038 97.174,89.947 R3.2@97.217,89.947 ; v2@100.33,100.203 C8.2 ; IC1.1 118.2,106.492 118.774,105.918 v2(118.872,105.918) ; IC2.1 120.493,89.347 121.067,88.773 v2(121.158,88.773)
  other v1: 84.201,129.032 94.361,129.032 104.013,129.032 114.173,129.032 119.888,129.032 124.841,129.032 77.343,129.286 72.263,129.413 119.888,130.81 84.201,130.937 94.361,130.937 104.013,130.937 124.714,130.937 72.263,131.064 114.173,131.064 77.343,131.191 74.803,131.318 119.888,132.715 122.555,132.715 124.714,132.715 72.263,132.842 74.803,132.842 77.216,132.842 84.201,132.842 94.361,132.842 104.013,132.842 114.173,132.842
  other v2: 108.458,93.472 122.428,96.393 100.33,99.949 106.829,110.348 120.015,113.03
IC1_SW: C1.2 IC1.2 L1.1
IC2_SW: C12.2 IC2.2 L2.1
NetC1_1: C1.1 IC1.6
NetC12_1: C12.1 IC2.6
NetDS1_1: DS1.1 R5.2 | length 3.2
  Top Layer w0.254: R5.2 DS1.1
NetDS2_2: DS2.2 R7.2 | length 3.3
  Top Layer w0.254: R7.2 DS2.2
NetIC1_4: IC1.4 R1.1 R2.1
NetIC2_4: IC2.4 R4.1 R19.1
NRST: C16.1 P1.12 U1.7 | length 29.9
  Top Layer w0.254: C16.1 80.739,101.815 83.675,101.815 ; U1.7 85.537,99.953 83.675,101.815 ; P1.12 94.361,112.903 94.361,111.252 93.98,110.871 83.82,110.871 82.55,109.601 82.55,102.94 83.675,101.815
SWCLK: P1.6 U1.37 | length 10.6
  Top Layer w0.254: U1.37 93.682,106.636 98.298,111.252 P1.6
SWDIO: P1.4 U1.34 | length 21.6
  Top Layer w0.254: v2(94.742,106.309) 98.669,110.236 99.568,111.135 P1.4 ; U1.34 95.944,101.953 96.042,101.855 96.099,101.855 96.647,101.307 96.647,99.844 96.796,99.695 97.917,99.695 v2(98.044,99.822)
  Bottom Layer w0.254: v2(94.742,106.309) 96.342,104.709 96.586,104.709 98.044,103.251 v2(98.044,99.822)
SWO: P1.8 U1.39 | length 10.5
  Top Layer w0.254: U1.39 92.682,106.906 97.028,111.252 P1.8
WIPER: J6.2 U1.12 | length 15.7
  Top Layer w0.254: J6.2 73.149,97.028 74.927,95.25 83.801,95.25 85.923,97.372 85.923,97.432 85.944,97.453 U1.12
pads on no net: J4.MH1 J4.MH2 J4.MH3 J5.1 J5.MH1 J5.MH2 J5.MH3 J6.MH1 J6.MH2 J6.MH3 MH1. MH2. MH3. MH4. P1.1 P1.2 P1.9 P1.10 P1.13 P1.14 U1.2 U1.3 U1.4 U1.5 U1.6 U1.10 U1.13 U1.14 U1.15 U1.16 U1.19 U1.20 U1.21 U1.22 U1.25 U1.26 U1.27 U1.28 U1.29 U1.30 U1.31 U1.32 U1.33 U1.38 U1.40 U1.41 U1.42 U1.43 U1.45 U1.46

## Polygon pours and split planes (outlines as drawn)
GND on Top Layer "GND_L01_P070" (solid, pour order 70): 71.12,133.604 70.866,133.35 70.866,128.27 70.993,128.143 125.476,128.143 125.73,128.397 125.73,133.35 125.476,133.604
12V12 on Top Layer "12V12_L01_P071" (solid, pour order 71): 71.12,127 70.866,126.746 70.866,121.793 71.12,121.539 125.476,121.539 125.476,121.793 125.73,122.047 125.73,126.746 125.476,127
12V12 on Top Layer "12V12_L01_P072" (solid, pour order 72): 125.476,122.301 125.73,122.047 125.73,114.427 124.206,114.427 124.079,114.3 124.079,122.301 125.222,122.301
12V12 on Top Layer "12V12_L01_P054" (solid, pour order 54): 124.079,114.935 124.079,109.728 123.571,109.22 121.285,109.22 121.285,107.696 124.206,107.696 125.73,109.22 125.73,115.316 124.079,115.316
GND on Top Layer "GND_L01_P069" (solid, pour order 69): 101.727,106.426 101.727,105.537 101.981,105.283 107.823,105.283 108.077,105.537 108.077,110.363 105.791,110.363 105.537,110.109 105.537,107.569 104.521,106.553 101.854,106.553
GND on Top Layer "GND_L01_P029" (solid, pour order 29): 107.061,109.601 106.934,109.601 105.537,109.601 105.537,109.728 105.537,110.49 106.172,111.125 109.474,111.125 109.601,110.998 109.601,110.236 109.474,110.109 107.569,110.109
3V3 on Top Layer "3V3_L01_P068" (solid, pour order 68): 108.458,101.6 108.458,100.584 108.585,100.457 108.204,100.457 106.045,102.616 107.442,102.616
3V3 on Top Layer "3V3_L01_P004" (solid, pour order 4): 114.032,102.331 114.032,102.348 114.3,102.616 116.078,102.616 116.332,102.362 116.332,99.822 116.078,99.568 114.3,99.568 113.411,100.457 108.204,100.457 108.204,101.6 113.411,101.6 113.411,101.727 114.3,102.616
3V3 on Top Layer "3V3_L01_P067" (solid, pour order 67): 99.568,103.505 99.568,103.251 99.949,102.87 100.711,102.87 101.092,102.489 107.823,102.489 108.204,102.87 108.204,103.886 107.95,104.14 101.727,104.14 101.346,103.759 99.822,103.759
GND on Top Layer "GND_L01_P066" (solid, pour order 66): 105.156,87.249 106.68,88.773 106.68,91.694 106.617,91.757 109.283,91.757 109.283,87.439 109.601,87.122 109.601,86.233 109.347,85.979 106.934,85.979 106.68,86.233 106.172,86.233 105.918,85.979 103.632,85.979 103.378,86.233 103.378,86.995 103.632,87.249
5V5 on Top Layer "5V5_L01_P065" (solid, pour order 65): 107.061,84.709 106.172,84.709 105.664,85.217 103.632,85.217 103.251,84.836 103.251,83.439 103.505,83.185 106.045,83.185 106.426,83.566 107.061,83.566
5V5 on Top Layer "5V5_L01_P062" (solid, pour order 62): 106.426,83.566 107.188,82.804 107.188,82.042 107.569,81.661 108.331,81.661 108.712,82.042 108.712,82.804 109.474,83.566
GND on Top Layer "GND_L01_P049" (solid, pour order 49): 108.521,94.17 108.458,94.234 107.442,94.234 106.617,93.408 106.617,91.757 106.743,91.63 109.156,91.63 109.283,91.757 109.283,92.519 109.918,93.154 111.823,93.154 111.823,94.17
NetIC2_4 on Top Layer "NETIC2_4_L01_P048" (solid, pour order 48): 116.008,91.541 116.103,91.635 116.103,91.648 117.354,91.648 117.455,91.546 117.459,91.546 117.459,90.947 117.363,90.851 117.363,90.848 116.107,90.848 116.009,90.947 116.009,90.952 111.736,90.952 111.728,90.96 111.662,90.895 111.662,90.882 110.381,90.882 110.236,91.027 110.236,91.636 110.528,91.928 111.722,91.928 111.79,91.859 112.082,91.567
NetIC2_4 on Top Layer "NETIC2_4_L01_P047" (solid, pour order 47): 110.233,86.666 110.106,86.539 110.106,85.523 110.36,85.269 111.63,85.269 111.884,85.523 111.884,86.412 111.63,86.666 111.633,86.669 111.633,91.313 110.233,91.313
IC2_SW on Top Layer "IC2_SW_L01_P045" (solid, pour order 45): 122.174,86.995 121.92,87.249 115.443,87.249 114.89,86.995 113.923,86.995 113.369,87.249 113.369,87.884 113.923,88.138 114.95,88.138 115.503,87.884 122.301,87.884 122.936,87.249 122.936,86.233 124.206,84.963 124.206,83.185 123.698,82.677 121.793,82.677 121.793,85.852 122.174,86.233
5V5 on Top Layer "5V5_L01_P044" (solid, pour order 44): 116.967,84.963 119.126,84.963 119.126,83.446 117.355,83.446 106.8,83.446 106.68,83.566 106.68,84.709 107.322,85.351 110.116,85.351 110.878,84.589 116.593,84.589
NetC12_1 on Top Layer "NETC12_1_L01_P043" (solid, pour order 43): 113.728,89.662 113.983,89.916 115.252,89.916 115.506,89.662 117.665,89.662 117.792,89.535 117.792,89.154 117.665,89.027 115.506,89.027 115.252,88.773 113.983,88.773 113.728,89.027
NetIC1_4 on Top Layer "NETIC1_4_L01_P024" (solid, pour order 24): 113.849,108.686 113.944,108.78 113.944,108.793 115.195,108.793 115.296,108.691 115.3,108.691 115.3,108.092 115.204,107.996 115.204,107.993 113.948,107.993 113.85,108.092 113.85,108.097 109.577,108.097 109.569,108.105 109.503,108.04 109.503,108.027 108.444,108.027 108.299,108.172 108.291,108.172 108.291,108.994 108.365,109.068 109.559,109.068 109.563,109.073 109.631,109.004 109.69,109.004 109.982,108.712
IC1_SW on Top Layer "IC1_SW_L01_P014" (solid, pour order 14): 119.761,104.013 119.507,104.267 113.03,104.267 112.477,104.013 111.51,104.013 110.956,104.267 110.956,104.902 111.51,105.156 112.537,105.156 113.09,104.902 119.888,104.902 120.523,104.267 120.523,103.251 121.285,102.489 121.285,99.695 121.031,99.441 119.126,99.441 118.872,99.695 118.872,102.362 119.761,103.251
NetC1_1 on Top Layer "NETC1_1_L01_P005" (solid, pour order 5): 111.125,106.807 111.379,107.061 112.649,107.061 112.903,106.807 115.062,106.807 115.189,106.68 115.189,106.299 115.062,106.172 112.903,106.172 112.649,105.918 111.379,105.918 111.125,106.172
IC2_SW on Top Layer "IC2_SW_L01_P046" (solid, pour order 46): 120.269,89.916 120.396,89.789 122.428,89.789 122.428,88.646 121.539,87.757 121.539,87.63 122.301,87.63 123.063,88.392 123.063,89.916 122.682,90.297 120.523,90.297 120.142,90.678 118.999,90.678 118.872,90.551 118.872,90.043 118.999,89.916
IC1_SW on Top Layer "IC1_SW_L01_P017" (solid, pour order 17): 117.817,107.061 117.944,106.934 119.888,106.934 119.888,105.791 118.999,104.902 118.999,104.775 119.761,104.775 120.523,105.537 120.523,107.061 120.142,107.442 117.983,107.442 117.602,107.823 116.459,107.823 116.377,107.741 116.377,107.143 116.459,107.061
12V12 on Top Layer "12V12_L01_P021" (solid, pour order 21): 116.471,108.69 115.605,107.823 113.919,107.823 113.792,107.696 113.792,107.188 113.919,107.061 115.189,107.061 115.316,107.188 115.57,107.188 116.459,108.077 116.459,108.712
12V12 on Top Layer "12V12_L01_P042" (solid, pour order 42): 118.884,91.545 118.018,90.678 116.332,90.678 116.205,90.551 116.205,90.043 116.332,89.916 117.602,89.916 117.729,90.043 117.983,90.043 118.872,90.932 118.872,91.567
12V12 on Top Layer "12V12_L01_P041" (solid, pour order 41): 118.872,91.44 118.999,91.567 121.031,91.567 121.539,92.075 123.825,92.075 124.333,91.567 124.333,91.059 123.825,90.551 121.539,90.551 121.158,90.932 118.999,90.932 118.872,91.059
12V12 on Top Layer "12V12_L01_P051" (solid, pour order 51): 123.825,92.075 126.375,92.075 126.873,91.577 126.873,90.971 126.414,90.512 123.825,90.512
12V12 on Top Layer "12V12_L01_P058" (solid, pour order 58): 124.079,107.823 125.479,106.423 125.479,91.44 126.873,91.44 126.873,108.077 125.603,109.347
GND on Top Layer "GND_L01_P056" (solid, pour order 56): 118.872,112.141 118.872,112.014 118.618,111.76 118.618,111.125 118.872,110.871 121.412,110.871 121.666,111.125 121.666,111.76 120.777,112.649 120.777,113.792 119.253,113.792 119.253,112.395
12V12 on Top Layer "12V12_L01_P008" (solid, pour order 8): 116.332,108.585 116.459,108.712 118.491,108.712 118.999,109.22 121.285,109.22 121.793,108.712 121.793,108.204 121.285,107.696 118.999,107.696 118.618,108.077 116.459,108.077 116.332,108.204
GND on Top Layer "GND_L01_P053" (solid, pour order 53): 121.274,94.868 121.274,94.858 121.031,94.615 121.031,93.98 121.285,93.726 123.825,93.726 124.079,93.98 124.079,94.742 123.19,95.631 123.19,97.028 122.936,97.282 121.92,97.282 121.666,97.028 121.666,95.25 121.031,94.615
NetIC1_4 on Top Layer "NETIC1_4_L01_P027" (solid, pour order 27): 108.582,103.557 108.455,103.43 108.455,102.414 108.709,102.16 109.979,102.16 110.233,102.414 110.233,103.303 109.979,103.557 109.982,103.56 109.982,108.551 108.678,108.551 108.582,108.455
12V12 on Bottom Layer "12V12_L04_P080" (solid, pour order 80): 71.12,127 70.866,126.746 70.866,121.793 71.12,121.539 125.476,121.539 125.476,121.793 125.73,122.047 125.73,126.746 125.476,127
GND on Bottom Layer "GND_L04_P078" (solid, pour order 78): 71.12,133.604 70.866,133.35 70.866,128.27 70.993,128.143 125.476,128.143 125.73,128.397 125.73,133.35 125.476,133.604
5V5 on Bottom Layer "5V5_L04_P064" (solid, pour order 64): 105.742,78.486 105.742,78.564 109.093,81.915 109.093,83.185 108.839,83.439 107.315,83.439 106.934,83.058 106.934,81.915 103.505,78.486
5V5 on Bottom Layer "5V5_L04_P063" (solid, pour order 63): 105.742,78.486 103.964,76.708 79.778,76.708 73.583,82.903 71.932,82.903 71.424,83.411 71.424,84.427 71.932,84.935 74.091,84.935 80.54,78.486
3V3 on 3V3 Polygon "3V3_L03_P001" (solid, pour order 1): 102.489,117.602 102.616,117.475 107.95,117.475 107.95,112.014 108.077,111.887 107.95,111.76 102.743,111.76 102.743,110.363 103.632,110.363 103.632,102.616 103.759,102.743 107.569,102.743 107.569,95.885 107.696,95.758 102.87,95.758 102.997,95.631 102.997,78.74 78.359,78.74 78.105,78.994 78.105,90.805 71.755,90.805 71.501,91.059 71.501,98.933 77.216,98.933 78.105,99.822 78.105,109.728 88.646,109.728 88.519,109.855 88.519,117.602
GND on GND-Plane "GND_L02_P000" (solid, pour order 0): 126.365,133.604 127,132.969 127,80.899 70.104,80.899 69.85,80.645 69.596,80.899 69.596,133.604

## Silkscreen, mask and mechanical layers (free items; w line width, h text height)
Mechanical 1:
  lines w0.254: 69.215,124.206 69.215,124.714 ; 72.262,139.954 125.095,139.954 ; 72.27,139.954 ccw(c72.27,136.906) 69.222,136.906 69.164,77.701 ccw(c71.985,77.701) 71.985,74.879 125.476,74.879 ccw(c125.476,77.673) 128.27,77.673 128.27,136.906 ccw(c125.222,136.906) 125.222,139.954